# Altium PCB PCB2.PcbDoc
Units mm, origin at the board's own origin, x right, y up, seen from the top; angles counter-clockwise.
Board outline 62 x 43 mm, 4 copper layers (L1 (Signal), L2 (GND), L3 (GND), L4 (GND)), stack 1.57 mm thick; 46 components, 31 nets, 234 pads, 56 vias.
Unrouted connection lines stored in the file: 7.
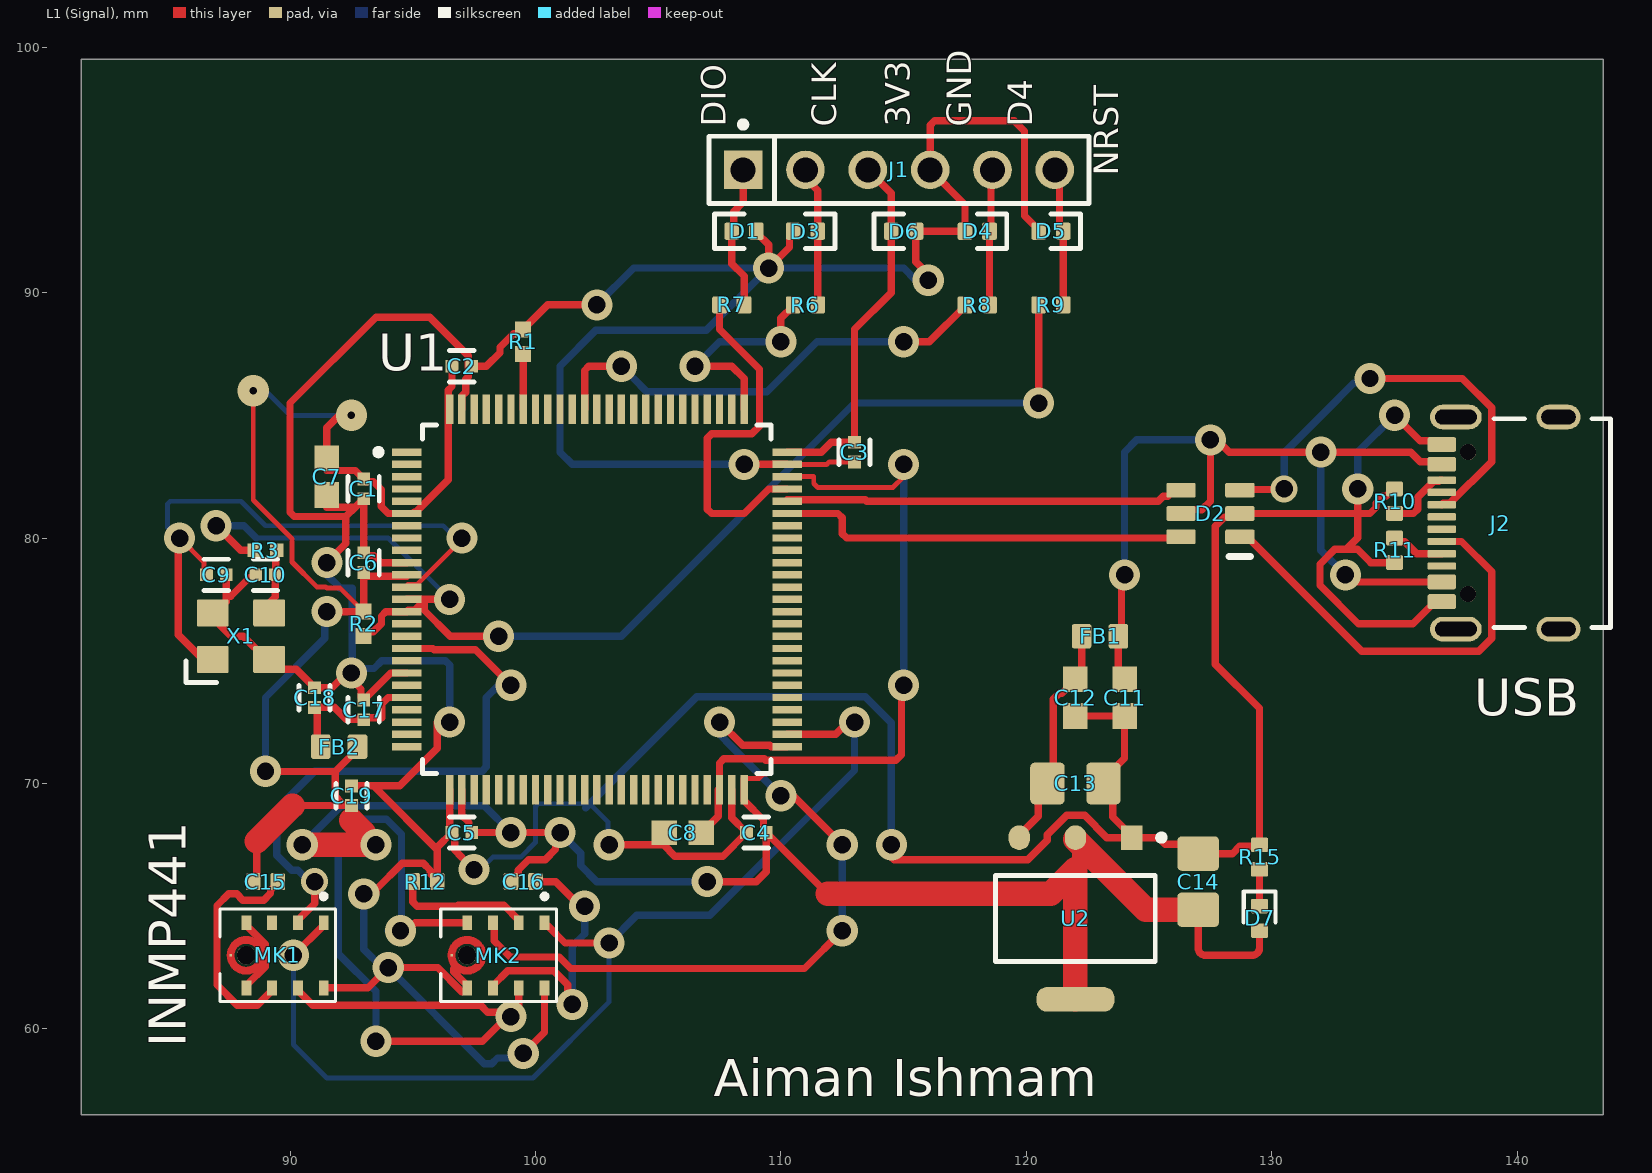
[diagram p0: L1 (Signal) view]
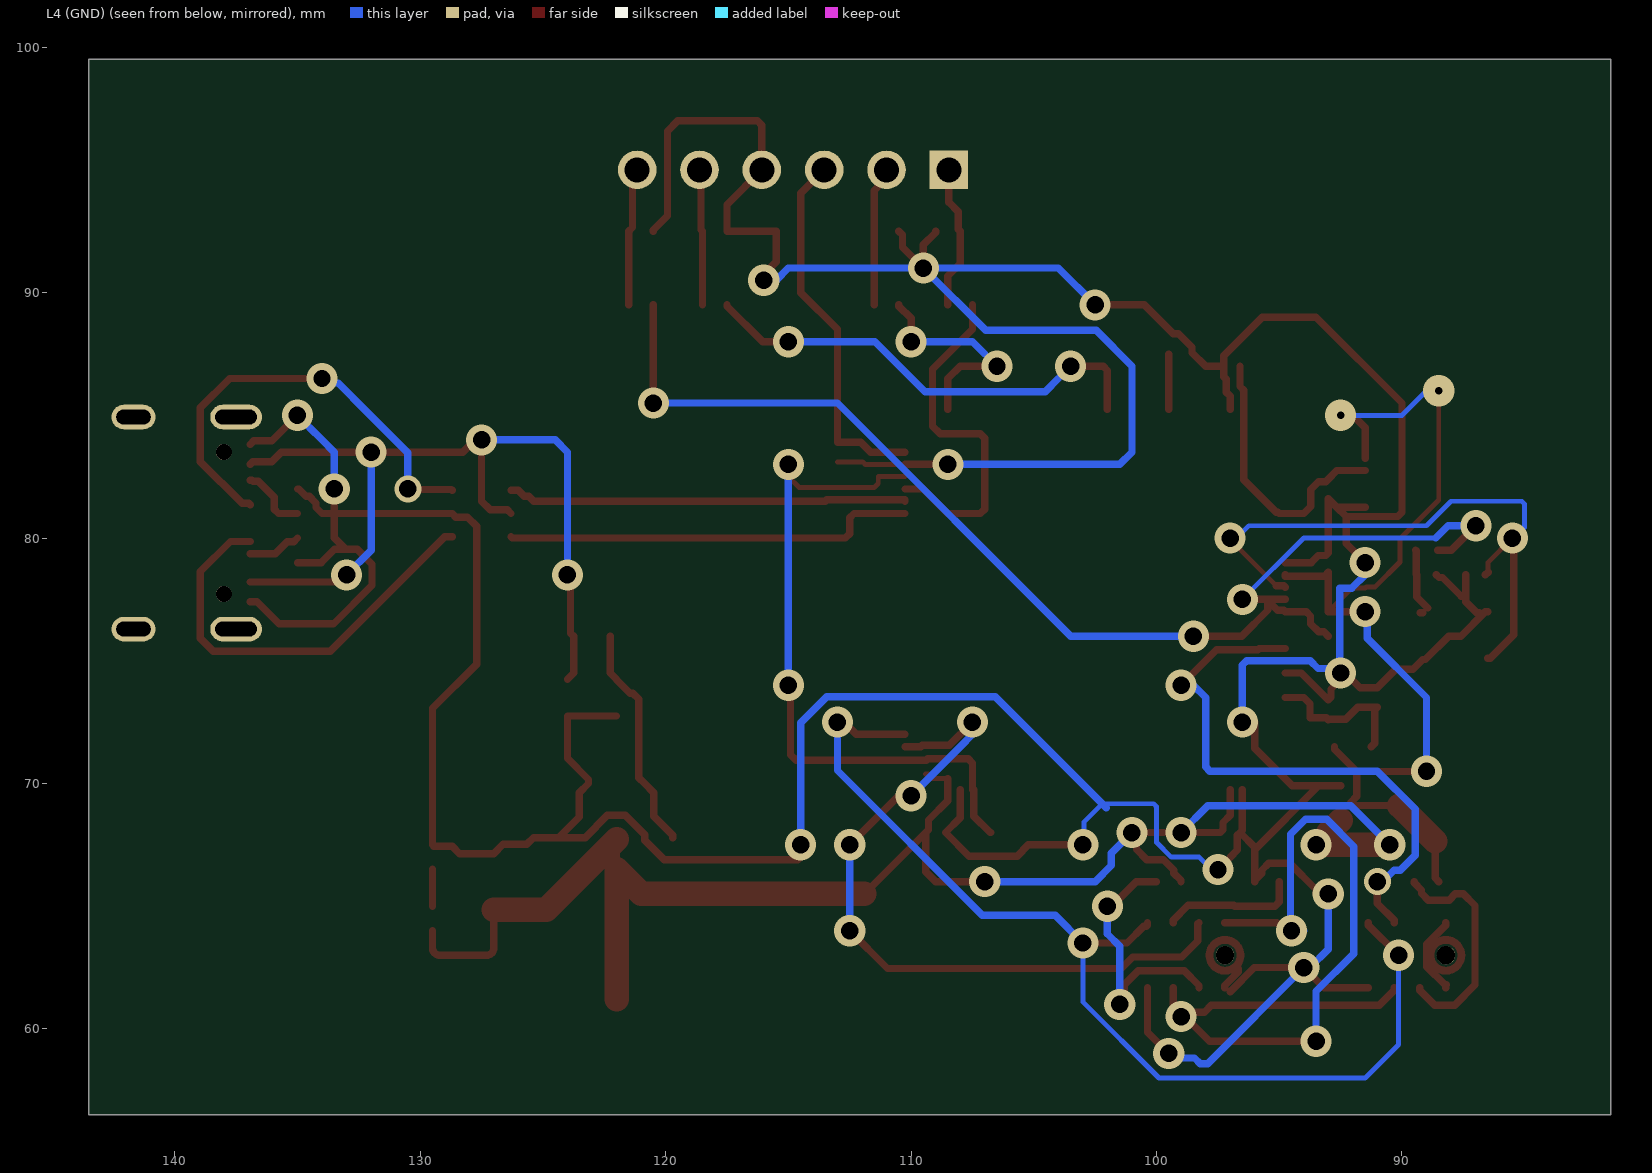
[diagram p1: L4 (GND) view, seen from below]
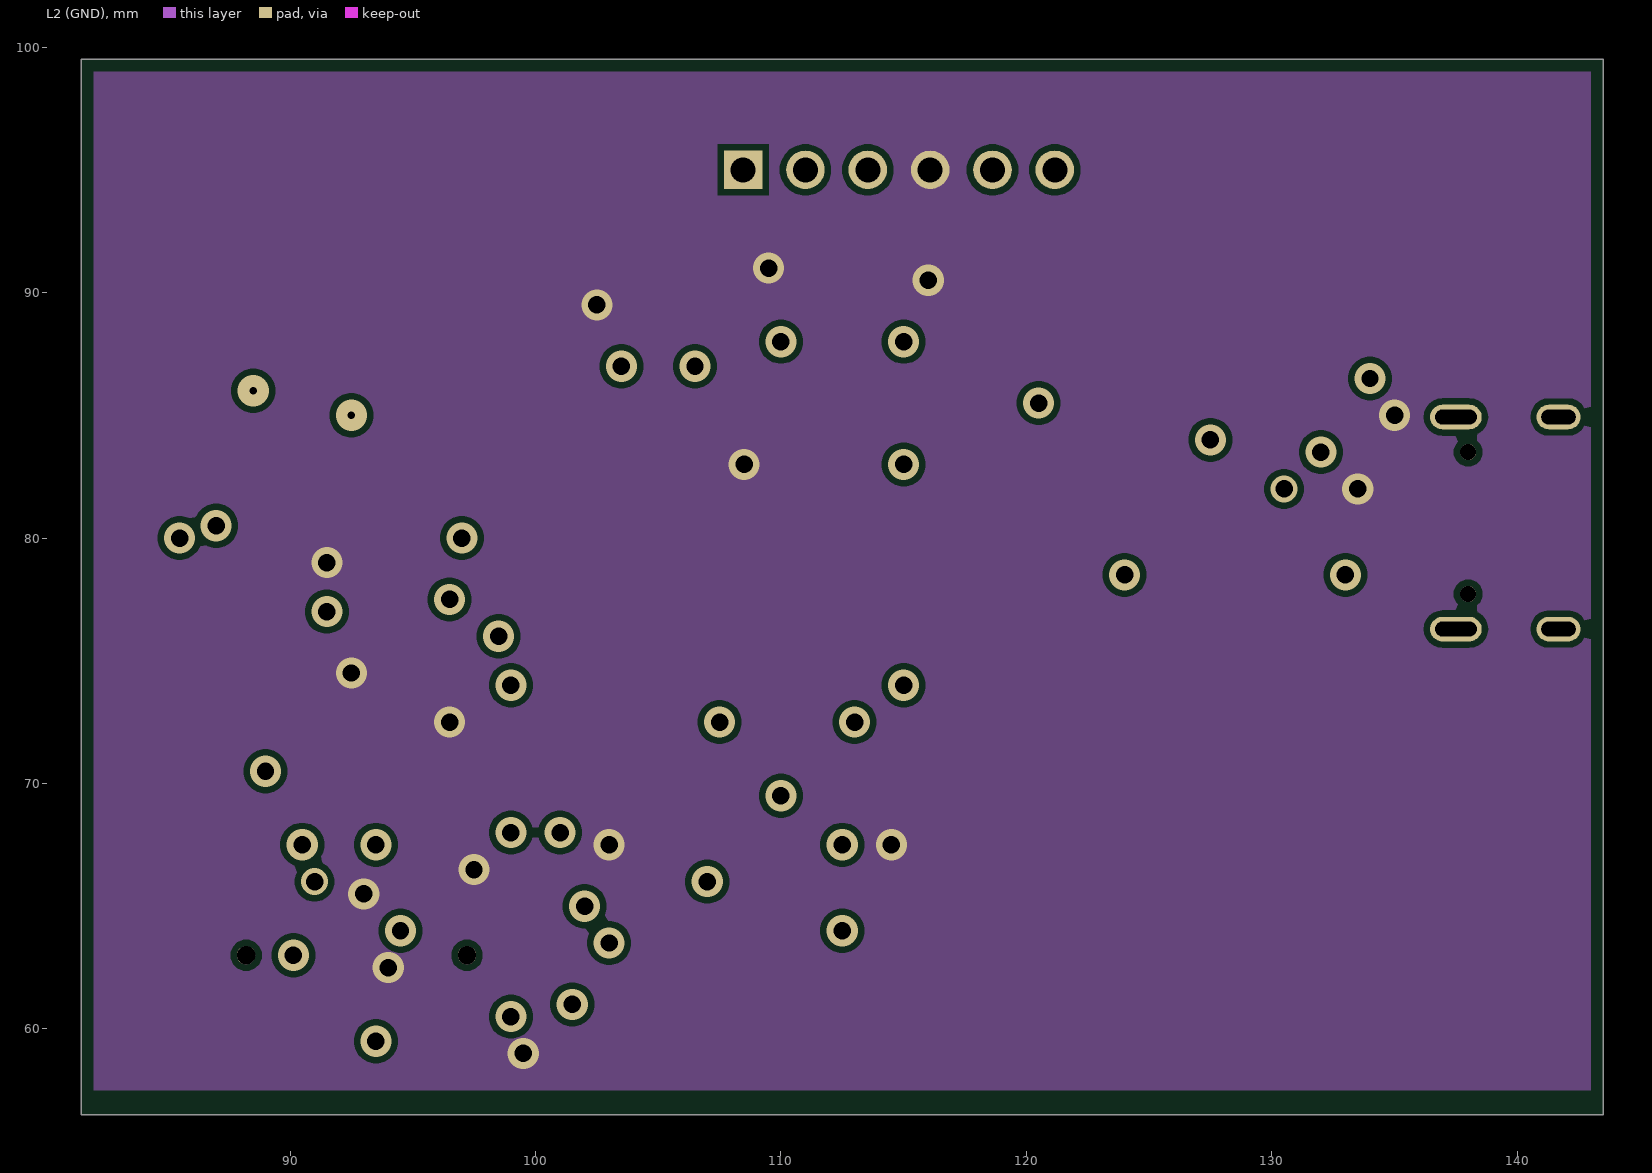
[diagram p2: L2 (GND)]
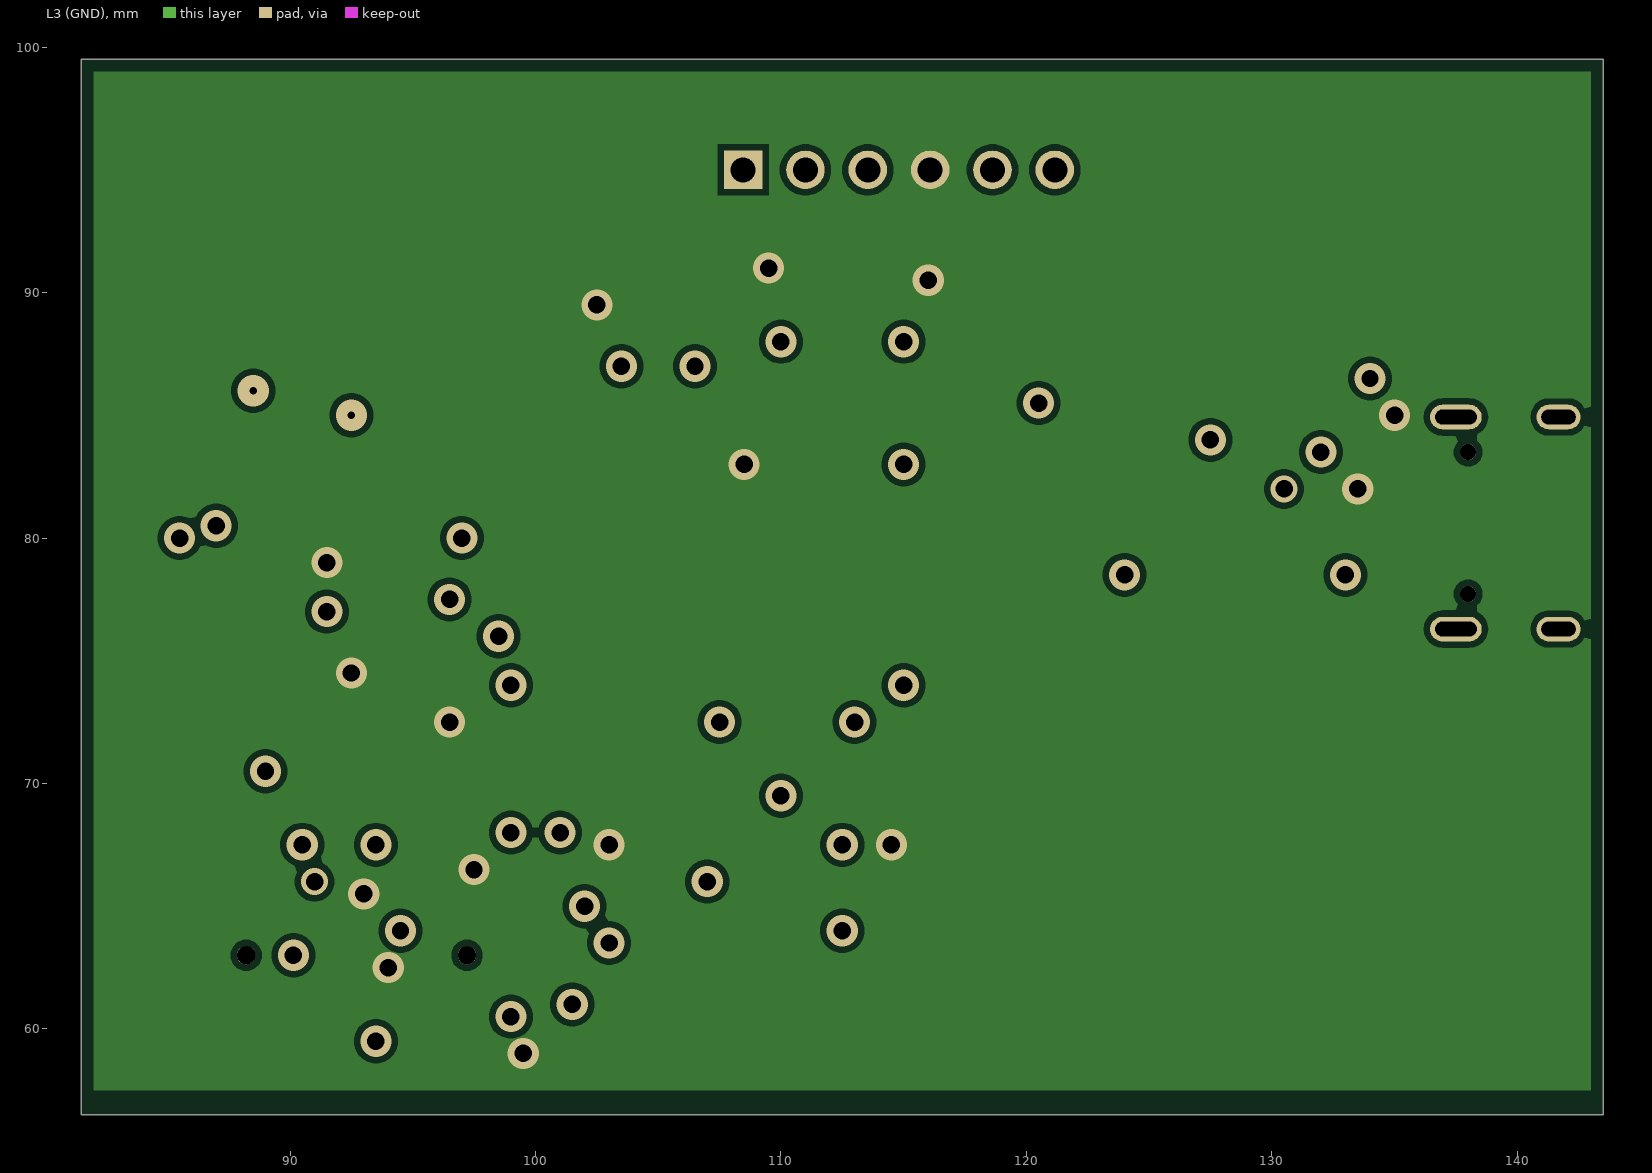
[diagram p3: L3 (GND)]
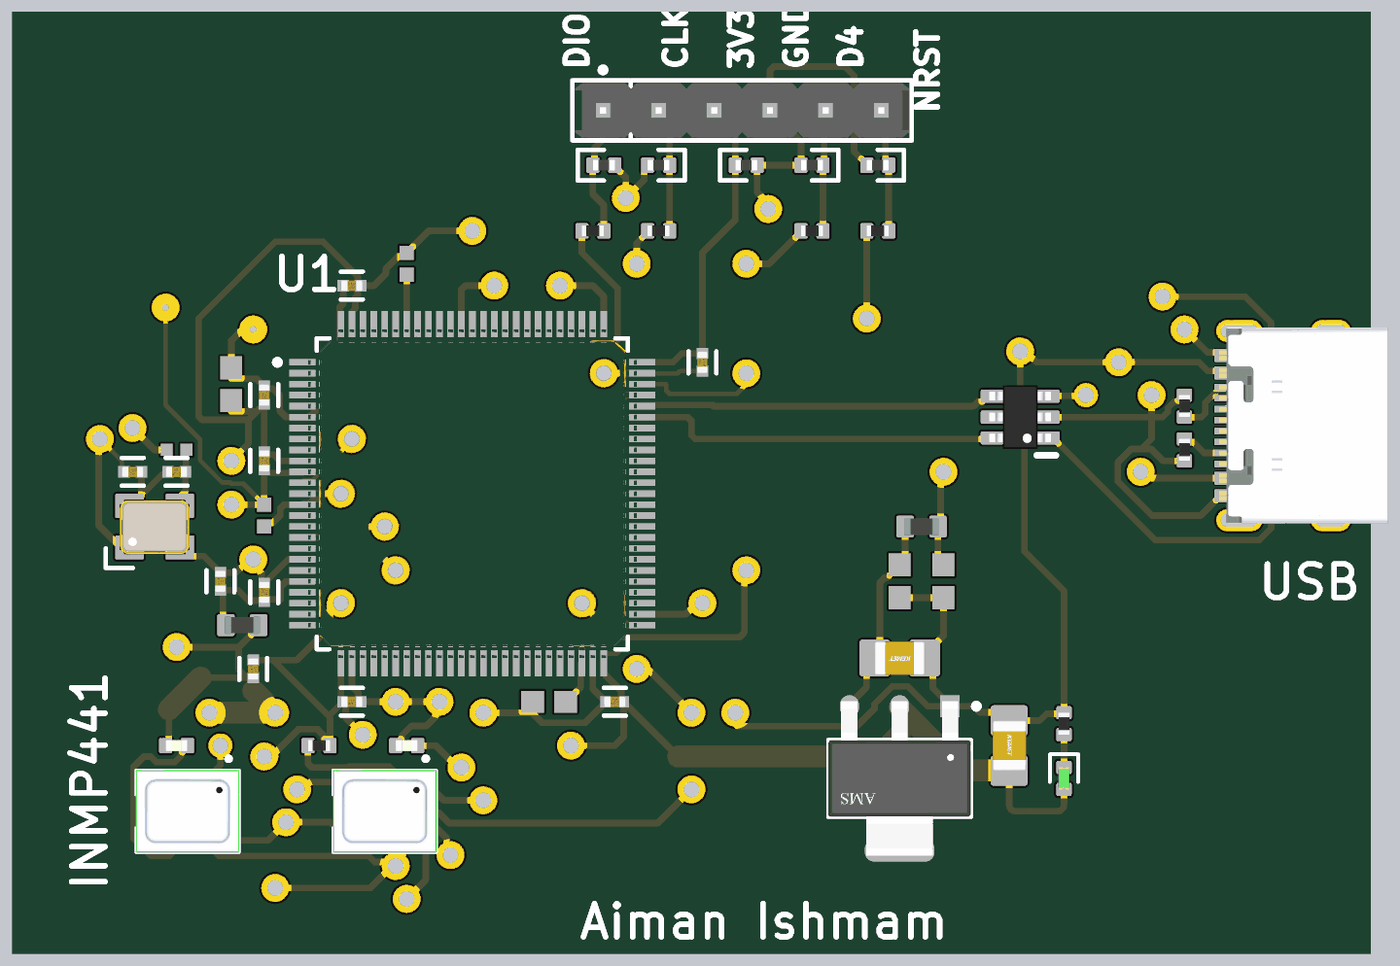
[diagram p4: 3D render of the assembled board from above, using the file's embedded part models]

## Layer stack, top to bottom
Top Solder: solder mask 0.0254, SM-001, Dk 4
L1 (Signal): signal copper 0.035
Dielectric 1: prepreg 0.2, PP-017, Dk 4.6
L2 (GND): signal copper 0.0175
Dielectric 3: core 1.065, Core-039, Dk 4.6
L3 (GND): signal copper 0.0175
Dielectric 5: prepreg 0.2, PP-017, Dk 4.6
L4 (GND): signal copper 0.035
Bottom Solder: solder mask 0.0254, SM-001, Dk 4

## Board outline
81.5,56.5 143.5,56.5 143.5,99.5 81.5,99.5

## Design rules (kind name [scope] priority, off if disabled: settings)
AssemblyTestPointUsage [All] p1: isadvanced=TRUE
AssemblyTestpoint [All] p1: isadvanced=TRUE testpointundercomponent=TRUE minsize=1.016 maxsize=2.54 preferedsize=1.524 minholesize=0 maxholesize=1.016 preferedholesize=0.813 testpointgrid=0.025 usegrid=TRUE gridtolerance=0 allowsidetop=TRUE allowsidebottom=TRUE
Clearance Clearance_1 [(ExistsOnLayer('L2 (GND)') Or ExistsOnLayer('L3 (GND)')) vs (ExistsOnLayer('L2 (GND)') Or ExistsOnLayer('L3 (GND)'))] p1: gap=0.254 ignorepadtopadclearanceinfootprint=FALSE sourcerule=38 cellrowname=All cellrowtype=0 cellcolname=All cellcoltype=0 innerlayers=TRUE
Clearance Clearance_2 [(ExistsOnLayer('L1 (Signal)') Or ExistsOnLayer('L4 (GND)')) vs (ExistsOnLayer('L1 (Signal)') Or ExistsOnLayer('L4 (GND)'))] p2: gap=0.254 ignorepadtopadclearanceinfootprint=FALSE sourcerule=38 cellrowname=All cellrowtype=0 cellcolname=All cellcoltype=0 outerlayers=TRUE
Clearance [All] p3: gap=0.254 ignorepadtopadclearanceinfootprint=FALSE ismatrix=TRUE
ComponentClearance [All] p1: isadvanced=TRUE gap=0.254 collisioncheckmode=3 verticalgap=0.254 showdistances=FALSE
DiffPairsRouting DifferentialPairsRouting_1 [All] p1: isadvanced=TRUE maxlimit=0.254 minlimit=0.254 mostfreqgap=0.254 toplayer_minwidth=0.381 toplayer_maxwidth=0.381 toplayer_prefwidth=0.381 midlayer1_minwidth=0.381 midlayer1_maxwidth=0.381 midlayer1_prefwidth=0.381 midlayer2_minwidth=0.381 midlayer2_maxwidth=0.381 midlayer2_prefwidth=0.381 bottomlayer_minwidth=0.381 bottomlayer_maxwidth=0.381 bottomlayer_prefwidth=0.381 maxuncoupledlength=0.254
DiffPairsRouting [All] p2: maxlimit=0.254 minlimit=0.254 mostfreqgap=0.254 toplayer_minwidth=0.381 toplayer_maxwidth=0.381 toplayer_prefwidth=0.381 midlayer1_minwidth=0.381 midlayer1_maxwidth=0.381 midlayer1_prefwidth=0.381 midlayer2_minwidth=0.381 midlayer2_maxwidth=0.381 midlayer2_prefwidth=0.381 bottomlayer_minwidth=0.381 bottomlayer_maxwidth=0.381 bottomlayer_prefwidth=0.381 maxuncoupledlength=12.7
FabricationTestPointUsage [All] p1: isadvanced=TRUE valid=0 allowmultiple=FALSE
FabricationTestpoint [All] p1: isadvanced=TRUE side=3 testpointundercomponent=TRUE minsize=1.016 maxsize=2.54 preferedsize=1.524 minholesize=0 maxholesize=1.016 preferedholesize=0.813 testpointgrid=0.025 allowsidetop=TRUE allowsidebottom=TRUE usegrid=TRUE gridtolerance=0
FanoutControl Fanout_BGA [IsBGA] p1: isadvanced=TRUE bgadir=Out bgaviamode=Centered fanoutstyle=Auto fanoutdirection=Alternating viagrid=0.025 // Fanout_BGA (Default Rule)
FanoutControl Fanout_LCC [IsLCC] p2: isadvanced=TRUE bgadir=Out bgaviamode=Centered fanoutstyle=Auto fanoutdirection=Alternating viagrid=0.025 // Fanout_LCC (Default Rule)
FanoutControl Fanout_SOIC [IsSOIC] p3: isadvanced=TRUE bgadir=Out bgaviamode=Centered fanoutstyle=Auto fanoutdirection=Alternating viagrid=0.025 // Fanout_SOIC (Default Rule)
FanoutControl Fanout_Small [(CompPinCount < 5)] p4: isadvanced=TRUE bgadir=Out bgaviamode=Centered fanoutstyle=Auto fanoutdirection=OutThenIn viagrid=0.025 // Fanout_Small (Default Rule)
FanoutControl Fanout_Default [All] p5: isadvanced=TRUE bgadir=Out bgaviamode=Centered fanoutstyle=Auto fanoutdirection=Alternating viagrid=0.025 // Fanout_Default (Default Rule)
Height [All] p1: isadvanced=TRUE minheight=0 maxheight=25.4 prefheight=12.7
HoleSize [All] p1: isadvanced=TRUE absolutevalues=TRUE maxlimit=2.54 minlimit=0.025 maxpercent=80.000 minpercent=20.000
HoleToHoleClearance [All] p1: isadvanced=TRUE gap=0.254 allowstackedmicrovias=TRUE
LayerPairs [All] p1: isadvanced=TRUE enforce=TRUE
MinimumSolderMaskSliver [All] p1: isadvanced=TRUE minsoldermaskwidth=0.254
NetAntennae [All] p1: isadvanced=TRUE netantennaetolerance=0
PasteMaskExpansion [All] p1: isadvanced=TRUE expansion=0
PlaneClearance [All] p1: isadvanced=TRUE clearance=0.508
PlaneConnect [All] p1: isadvanced=TRUE planeconnectstyle=Relief reliefexpansion=0.508 reliefentries=4 reliefconductorwidth=0.254 reliefairgap=0.254
PolygonConnect [All] p1: connectstyle=Direct reliefconductorwidth=0.254 reliefentries=4 polygonreliefangle="90 Angle" airgapwidth=0.254
RoutingCorners [All] p1: isadvanced=TRUE cornerstyle=45-Degree minsetback=2.54 maxsetback=2.54
RoutingPriority [All] p1: isadvanced=TRUE routingpriority=0
RoutingVias [All] p1: holewidth=0.711 width=1.27 viastyle="Through Hole" minholewidth=0.711 minwidth=1.27 maxholewidth=0.711 maxwidth=1.27
ShortCircuit [All] p1: isadvanced=TRUE allowed=FALSE
SilkToSilkClearance [All] p1: isadvanced=TRUE silktosilkclearance=0.254
SilkToSolderMaskClearance [IsPad] p1: isadvanced=TRUE minsilkscreentomaskgap=0.254 clearancetoexposedcopper=TRUE
SolderMaskExpansion [All] p1: isadvanced=TRUE expansion=0.102 istentingtop=FALSE
UnRoutedNet [All] p1: isadvanced=TRUE checkbadconnections=TRUE
UnpouredPolygon [All] p1: isadvanced=TRUE
Width MaxMinWidth_1 [All] p1: isadvanced=TRUE maxlimit=1 minlimit=0.2 preferedwidth=0.3 midlayer1_minwidth=0.254 midlayer1_maxwidth=0.254 midlayer1_prefwidth=0.254 midlayer2_minwidth=0.254 midlayer2_maxwidth=0.254 midlayer2_prefwidth=0.254 minimp=50.000000 maximp=50.000000 favimp=50.000000
Width [All] p2: maxlimit=0.254 minlimit=0.254 preferedwidth=0.254
3 further rules are at their usual default settings.

## Classes and differential pairs
component class USB_Connector: C11 C12 C13 C14 D2 D7 FB1 J2 R10 R11 R15 U2
component class INMP441: C15 C16 MK1 MK2 R12

## Components (designator, comment, footprint, x,y, rotation, side; value= is the part's Value field where it differs from the comment)
C1 "100n" FP-C0402-BB-MFG 93,82 r270 top value="0.10 μF"
C2 "100n" FP-C0402-BB-MFG 97,87 r0 top value="0.10 μF"
C3 "100n" FP-C0402-BB-MFG 113,83.5 r270 top value="0.10 μF"
C4 "100n" FP-C0402-BB-MFG 109,68 r180 top value="0.10 μF"
C5 "100n" FP-C0402-BB-MFG 97,68 r180 top value="0.10 μF"
C6 "100n" FP-C0402-BB-MFG 93,79 r90 top value="0.10 μF"
C7 "2.2u" CAPC1608X90X35NL15T15 91.5,82.5 r90 top
C8 "2.2u" CAPC1608X90X35NL15T15 106,68 r180 top
C9 "10pF" FP-C0402-BB-MFG 87,78.5 r0 top value="10 pF"
C10 "10pF" FP-C0402-BB-MFG 89,78.5 r180 top value="10 pF"
C11 "2.2u" CAPC1608X90X35NL15T15 124,73.5 r90 top
C12 "2.2u" CAPC1608X90X35NL15T15 122,73.5 r90 top
C13 "22u" CAP_0805 122,70 r180 top
C14 "22u" CAP_0805 127,66 r270 top
C15 "0.1u" CAP_0402 89,66 r180 top
C16 "0.1u" CAP_0402 99.5,66 r180 top
C17 "100n" FP-C0402-BB-MFG 93,73 r90 top value="0.10 μF"
C18 "100n" FP-C0402-BB-MFG 91,73.5 r90 top value="0.10 μF"
C19 "100n" FP-C0402-BB-MFG 92.5,69.5 r90 top value="0.10 μF"
D1 "" D_0402 108.5,92.5 r180 top
D2 "USBLC6-2SC6" SOT-23-6 127.5,81 r90 top
D3 "" D_0402 111,92.5 r0 top
D4 "" D_0402 118,92.5 r0 top
D5 "" D_0402 121,92.5 r0 top
D6 "" D_0402 115,92.5 r180 top
D7 "GREEN" LED_0402_GREEN 129.5,64.5 r90 top
FB1 "120R" FB_0603 123,76 r180 top
FB2 "200R" FB_0603 92,71.5 r180 top
J1 "22-28-4060" FP-22-28-4060-MFG 114.81,95 r0 top
J2 "USB4105-GF-A-060" USB4105-GF-A-060 139.303,80.61 r90 top
MK1 "INMP441ACEZ-R7" MIC_INMP441ACEZ-R7 89.5,63 r0 top
MK2 "INMP441ACEZ-R7" MIC_INMP441ACEZ-R7 98.5,63 r0 top
R1 "10K" RESC1005X40X25ML05T05 99.5,88 r270 top
R2 "10K" RESC1005X40X25ML05T05 93,76.5 r270 top
R3 "1K" RESC1005X40X25NL05T05 89,79.5 r0 top
R6 "22R" RES_0402 111,89.5 r0 top
R7 "22R" RES_0402 108,89.5 r0 top
R8 "22R" RES_0402 118,89.5 r0 top
R9 "22R" RES_0402 121,89.5 r0 top
R10 "5K1" RES_0402 135,81.5 r270 top
R11 "5K1" RES_0402 135,79.5 r90 top
R12 "100k" RES_0402 95.5,66 r180 top
R15 "1k" RES_0402 129.5,67 r270 top
U1 "STM32H750VBT6" FP-LQFP100-1L-MFG 102.5,77.5 r0 top
U2 "AMS1117-3.3" FP-AMS1117-IPC_C 122,64.5 r270 top
X1 "24MHz" XTAL_3225 88,76 r0 top

## Footprints (in the part's own frame and the unit in brackets; to place one, negate y for a bottom-side part, rotate by r counter-clockwise, add the part's x,y. Pads: shape width x height; smd on the part's side, far side on the other; paste and mask are expansions set on the pad)
CAP_0402 [mm]
  rrect25% 0.6x0.7 smd: 1(-0.5,0) 2(0.5,0)
  body extent -0.5,-0.26 0.5,0.26, height 0.37
CAP_0805 [mm]
  rrect25% 1.4x1.7 smd: 1(-1.143,0) 2(1.143,0)
  body extent -1.15,-0.76 1.15,0.79, height 1.01
CAPC1608X90X35NL15T15 [mm] "Chip Capacitor, 2-Leads, Body 1.60x0.81mm, IPC Medium Density"
  rect 1.05x1 smd: 1(-0.75,0) 2(0.75,0)
  body extent -0.88,-0.48 0.87,0.48, height 0.9
D_0402 [mm]
  rrect25% 0.6x0.7 smd: A(-0.5,0) K(0.5,0)
  silkscreen extent 0,-0.7 1.2,0.7, body extent -0.5,-0.25 0.5,0.25, height 0.51
FB_0603 [mm]
  rrect25% 0.8x1 smd: 1(-0.75,0) 2(0.75,0)
  body extent -0.8,-0.4 0.8,0.4, height 0.81
FP-22-28-4060-MFG [mm]
  rect 1.57x1.57 hole 1.02 paste-2539.97 mask+0: 1(-6.35,0)
  round 1.57 hole 1.02 paste-2539.97 mask+0: 2(-3.81,0) 3(-1.27,0) 4(1.27,0) 5(3.81,0) 6(6.35,0)
  silkscreen extent -7.75,-1.37 7.75,1.97, body extent -7.62,-1.25 7.62,1.24, height 8.88
FP-AMS1117-IPC_C [mm]
  rect 1.004x0.872 smd paste+0 mask+0: 1(-3.295,2.29)
  rrect100% 1.004x0.872 smd paste+0 mask+0: 2(-3.295,0) 3(-3.295,-2.29)
  rrect87% 1.004x3.182 smd paste+0 mask+0: 4(3.295,0)
  silkscreen extent -3.42,-3.25 1.75,3.63, body extent -3.9,-3.35 3.9,3.35, height 0.25
FP-C0402-BB-MFG [mm]
  rect 0.52x0.52 smd paste+0 mask+0: 1(-0.4,0) 2(0.4,0)
  silkscreen extent -0.5,-0.64 0.5,0.64, body extent -0.8,-0.4 0.8,0.4, height 0.25
FP-LQFP100-1L-MFG [mm]
  rect 1.2x0.3 smd paste+0 mask+0: 1(-7.75,6) 2(-7.75,5.5) 3(-7.75,5) 4(-7.75,4.5) 5(-7.75,4) 6(-7.75,3.5) 7(-7.75,3) 8(-7.75,2.5) 9(-7.75,2) 10(-7.75,1.5) 11(-7.75,1) 12(-7.75,0.5) 13(-7.75,0) 14(-7.75,-0.5) 15(-7.75,-1) 16(-7.75,-1.5) 17(-7.75,-2) 18(-7.75,-2.5) 19(-7.75,-3) 20(-7.75,-3.5) 21(-7.75,-4) 22(-7.75,-4.5) 23(-7.75,-5) 24(-7.75,-5.5) 25(-7.75,-6) 51(7.75,-6) 52(7.75,-5.5) 53(7.75,-5) 54(7.75,-4.5) 55(7.75,-4) 56(7.75,-3.5) 57(7.75,-3) 58(7.75,-2.5) 59(7.75,-2) 60(7.75,-1.5) 61(7.75,-1) 62(7.75,-0.5) 63(7.75,0) 64(7.75,0.5) 65(7.75,1) 66(7.75,1.5) 67(7.75,2) 68(7.75,2.5) 69(7.75,3) 70(7.75,3.5) 71(7.75,4) 72(7.75,4.5) 73(7.75,5) 74(7.75,5.5) 75(7.75,6)
  rect 0.3x1.2 smd paste+0 mask+0: 26(-6,-7.75) 27(-5.5,-7.75) 28(-5,-7.75) 29(-4.5,-7.75) 30(-4,-7.75) 31(-3.5,-7.75) 32(-3,-7.75) 33(-2.5,-7.75) 34(-2,-7.75) 35(-1.5,-7.75) 36(-1,-7.75) 37(-0.5,-7.75) 38(0,-7.75) 39(0.5,-7.75) 40(1,-7.75) 41(1.5,-7.75) 42(2,-7.75) 43(2.5,-7.75) 44(3,-7.75) 45(3.5,-7.75) 46(4,-7.75) 47(4.5,-7.75) 48(5,-7.75) 49(5.5,-7.75) 50(6,-7.75) 76(6,7.75) 77(5.5,7.75) 78(5,7.75) 79(4.5,7.75) 80(4,7.75) 81(3.5,7.75) 82(3,7.75) 83(2.5,7.75) 84(2,7.75) 85(1.5,7.75) 86(1,7.75) 87(0.5,7.75) 88(0,7.75) 89(-0.5,7.75) 90(-1,7.75) 91(-1.5,7.75) 92(-2,7.75) 93(-2.5,7.75) 94(-3,7.75) 95(-3.5,7.75) 96(-4,7.75) 97(-4.5,7.75) 98(-5,7.75) 99(-5.5,7.75) 100(-6,7.75)
  silkscreen extent -9.02,-7.1 7.1,7.1, body extent -8.45,-8.45 8.45,8.45, height 0.25
LED_0402_GREEN [mm]
  rrect25% 0.6x0.7 smd: A(-0.5,0) K(0.5,0)
  silkscreen extent -0.15,-0.65 1.1,0.65, body extent -0.51,-0.25 0.51,0.25, height 0.45
MIC_INMP441ACEZ-R7 [mm]
  rect 0.4x0.6 smd paste-0.025: 1(1.87,1.33) 2(0.82,1.33) 3(-0.23,1.33) 4(-1.28,1.33) 6(-1.28,-1.33) 7(-0.23,-1.33) 8(0.82,-1.33) 9(1.87,-1.33)
  rect 0.1x0.1 smd paste-1 mask+0: 5(-1.92,0)
  round 0.75 hole 0.75 unplated mask+0.505: ""(-1.29,0)
  L1 (Signal) region: 244 vertices and 0 holes, not listed, extent -2.07,-0.78 -0.51,0.78
  silkscreen extent -2.36,-1.88 2.36,2.5, body extent -2.36,-1.88 2.36,1.88, height 1.05
RES_0402 [mm]
  rrect25% 0.6x0.7 smd: 1(-0.5,0) 2(0.5,0)
  body extent -0.5,-0.25 0.5,0.25, height 0.3
RESC1005X40X25ML05T05 [mm] "Chip Resistor, 2-Leads, Body 1.00x0.50mm, IPC Low Density"
  rect 0.65x0.65 smd: 1(-0.5,0) 2(0.5,0)
  body extent -0.53,-0.27 0.53,0.28, height 0.4
RESC1005X40X25NL05T05 [mm] "Chip Resistor, 2-Leads, Body 1.00x0.50mm, IPC Medium Density"
  rect 0.55x0.55 smd: 1(-0.45,0) 2(0.45,0)
  body extent -0.53,-0.27 0.53,0.28, height 0.4
SOT-23-6 [mm]
  rrect25% 0.6x1.2 smd: 1(-0.95,-1.2) 2(0,-1.2) 3(0.95,-1.2) 4(0.95,1.2) 5(0,1.2) 6(-0.95,1.2)
  silkscreen extent -1.75,-1.63 -1.75,-0.76, body extent -1.45,-1.4 1.45,1.4, height 1.45
USB4105-GF-A-060 [mm]
  rrect25% 0.6x1.15 smd mask+0.05: A1B12(-3.2,2.378) A4B9(-2.4,2.378) B1A12(3.2,2.378) B4A9(2.4,2.378)
  rrect25% 0.3x1.15 smd mask+0.05: A5(-1.25,2.378) A6(-0.25,2.378) A7(0.25,2.378) A8(1.25,2.378) B5(1.75,2.378) B6(0.75,2.378) B7(-0.75,2.378) B8(-1.75,2.378)
  round 0.65 hole 0.65 unplated mask+0.05: MH(-2.89,1.303) MH(2.89,1.303)
  oval 1x1.8 hole 0.6 slot 1.4 at 90 deg: SH(-4.32,-2.377) SH(4.32,-2.377)
  oval 1x2.1 hole 0.6 slot 1.7 at 90 deg: SH(-4.32,1.803) SH(4.32,1.803)
  silkscreen extent -4.25,-4.5 4.25,0.25, body extent -4.47,-4.97 4.47,2.73, height 3.27
XTAL_3225 [mm]
  rrect10% 1.3x1.1 smd: 1(-1.15,-0.95) 2(1.15,-0.95) 3(1.15,0.95) 4(-1.15,0.95)
  silkscreen extent -2.23,-1.89 -1,-1, body extent -1.6,-1.28 1.6,1.22, height 0.61

## Part data
C1 C2 C3 C4 C5 C6 C17 C18 C19: library part CMP-03020-006638-2, "C0402 0.10 μF X7R 5.00% 16 V", Capacitance="0.10 μF", Manufacturer=Kemet, Manufacturer Part Number=C0402C104J4RAC, Package=C0402-BB, Temperature="-55°C to +125°C", Temperature Characteristic=X7R, Temperature Coefficient=15%, Temperature Range High=+125°C, Temperature Range Low=-55°C, Tolerance=0.05, Voltage Rating="16 V", Automotive=No, Category=Cap, ComponentLink2Description=Datasheet, ComponentLink2URL=https://content.kemet.com/datasheets/KEM_C1002_X7R_SMD.pdf, Device Class L1="Passive Components", Device Class L2=Capacitors, Device Class L3="Ceramic Capacitors", Height=0.55mm, Ipc Land Pattern Name=CAPC10050X50, Lead Free=Yes, Material=Ceramic, Mouser Description="Capacitor, Ceramic, 100nF, 16VDC, 5-% Tol, 5+% Tol, X7R-TC Code, -15, 15%-TC", Octopart=https://octopart.com/c0402c104j4rac-kemet-24931384, RoHS=TRUE
C7 C8 C11 C12: library part CMP-1035-02765-2, Manufacturer=Kemet, Part Number=C0603C225M4PACTU
C9 C10: library part CMP-2008-03377-2, "CAP CER 10PF 16V NP0 0402", Capacitance="10 pF", Manufacturer=Kemet, Manufacturer Part Number=C0402C100J4GACTU, Package=C0402-BB, Temperature="-55°C to +125°C", Temperature Characteristic=C0G, Temperature Coefficient=15%, Temperature Range High=+125°C, Temperature Range Low=-55°C, Tolerance=0.05, Voltage Rating="16 V", Automotive=No, Category=Cap, ComponentLink2Description=Datasheet, ComponentLink2URL=https://content.kemet.com/datasheets/KEM_C1002_X7R_SMD.pdf, Device Class L1="Passive Components", Device Class L2=Capacitors, Device Class L3="Ceramic Capacitors", Digikey Description="CAP CER 10PF 16V NP0 0402", Height=0.55mm, Ipc Land Pattern Name=CAPC10050X50, Lead Free=Yes, Material=Ceramic, Mouser Description="Capacitor, Ceramic, 10Pf, 16Vdc, 5-% Tol, 5+% Tol, C0g-Tc Code, -30, 30Ppm-Tc Rohs Compliant: Yes", Octopart=https://octopart.com/c0402c100j4gactu-kemet-17536146, RoHS=TRUE
C13 C14: library part CAP_0805, "Capacitor SMD 0805"
C15 C16: library part CAP_0402, "Capacitor SMD 0402"
D1 D3 D4 D5 D6: library part D_TVS_0402, "Diode TVS / ESD 0402"
D2: "Low-Capacitance ESD Protection USB", Manufacturer=STMicroelectronics, Distributor Link=https://www.mouser.de/ProductDetail/STMicroelectronics/USBLC6-2SC6?qs=po45yt2pPpu%2FhNIlwQdTlg%3D%3D, Manufacturer Part Number=USBLC6-2SC6
D7: library part LED_0402_GREEN, "LED 0402 GREEN SMD"
FB1 FB2: library part FB_0603, "Ferrite Bead SMD 0603"
J1: library part CMP-04776-000763-1, "CONN HEADER VERT 6POS 2.54MM", Color=Black, Contact Resistance=20mR, Current Rating=4A, Max Operating Temperature=75°C, Max Voltage Rating (AC)=250V, Max Voltage Rating (DC)=250.25kV, Min Operating Temperature=0°C, Package Quantity=1, Connector Type="Male Pin", Contact Material=Brass, Contact Mating Length=0.24inch, Contact Plating=Tin, Contact Type="Male Pin", Depth=2.49mm, Gender=Male, Housing Color=Black, Housing Material=Thermoplastic, Length=15.24mm, Mount="Through Hole", Number Of Contacts=6, Number of Positions=6, Number Of Rows=1, Orientation=Straight, Packaging=Bulk, Pitch=2.54mm, RoHS Compliant=Yes, Series="KK® 42375", Termination=Solder, Voltage Rating=250V
J2: "USB Connector Type C SMT 12 Pin", Manufacturer=GCT, Distributor Link=https://eu.mouser.com/ProductDetail/GCT/USB4105-GF-A-060?qs=QNEnbhJQKvY2mocwNJzgfA%3D%3D, Manufacturer Part Number=USB4105-GF-A-060
MK1 MK2: "60 Hz ~ 15 kHz Digital, I2S Microphone MEMS (Silicon) 1.62 V ~ 3.63 V Omnidirectional (-26dB Â±3dB @ 94dB SPL) Solder Pads", Package="LGA-9 TDK InvenSense", Check_prices=https://www.snapeda.com/parts/INMP441ACEZ-R7/TDK/view-part/?ref=eda, MF="TDK InvenSense", MP=INMP441ACEZ-R7, SnapEDA_Link=https://www.snapeda.com/parts/INMP441ACEZ-R7/TDK/view-part/?ref=snap
R1 R2: library part CMP-2002-00433-1, Manufacturer=Panasonic, Part Number=ERJ-2GEJ103X
R3: library part CMP-2002-00432-1, Manufacturer=Panasonic, Part Number=ERJ-2GEJ102X
R6 R7 R8 R9 R10 R11 R12 R15: library part RES_0402, "Resistor SMD 0402"
U1: library part CMP-12105-000017-1, "IC MCU 32BIT 128KB FLASH 100LQFP", Ambient Temperature Range High=+85°C, Ambient Temperature Range Low=-40°C, Frequency=480MHz, Manufacturer=STMicroelectronics, Max Junction Temp=+125°C, Max Supply Voltage=3.6V, Min Supply Voltage=1.62V, Package=LQFP100-1L, Temperature="-40°C to +125°C", Automotive=No, Category=IC, ComponentLink2Description=Datasheet, ComponentLink2URL=https://www.st.com/resource/en/datasheet/stm32h750vb.pdf, Core Architecture="ARM Cortex-M7", Data Bus Width=32bits, Device Class L1="Integrated Circuits (ICs)", Device Class L2="Embedded Processors and Controllers", Device Class L3=Microcontrollers, Digikey Description="IC MCU 32BIT 128KB FLASH 100LQFP", Height=1.6mm, Interface=I2C,SPI,UART,USART,CAN,USB,LIN,IrDA,Ethernet,I2S,Other, Lead Free=Yes, Manufacturer Part Number=STM32H750VBT6, Memory Size=128KBytes, Memory Type=FLASH, Mouser Description="MCU 32-Bit STM32H750VB ARM Cortex M7 RISC 128KB Flash 1.8V/2.5V/3.3V 100-Pin LQFP Tray", Number Of A/D Converters=3, Number Of Adc Channels=36, Number Of Cores=1, Number Of Ethernet Channels=1, Number Of I2C Channels=4, Number Of I/Os=82, Number Of Pwm Channels=42, Number Of Spi Channels=6, Number Of Timers/Counters=20, Number Of Uart Channels=9, Number Of Usb Channels=2, Octopart=https://octopart.com/stm32h750vbt6-stmicroelectronics-94048547, Ram Size=1MBytes, RoHS=TRUE, Standoff Height=0.05mm, Temperature Range High=+125°C, Temperature Range Low=-40°C
U2: library part CMP-209535-000001-1, "LDO Voltage Regulators 1A, 3.3V", Dropout Voltage=1.1V, Manufacturer="Advanced Monolithic Systems", Max Junction Temp=+125°C, Max Power Dissipation=1.2W, Max Supply Voltage=15V, Nominal Supply Current=5mA, Output Current=1A, Output Voltage=3.3V, Package=AMS1117, Temperature="-40°C to +125°C", Temperature Range Low=-40°C, Automotive=No, Category=IC, ComponentLink2Description=Datasheet, ComponentLink2URL=http://www.advanced-monolithic.com/pdf/ds1117.pdf, Device Class L1="Integrated Circuits (ICs)", Device Class L2="Power Management ICs", Device Class L3="Voltage Regulators - Linear", Height=1.8mm, Ipc Land Pattern Name=SOT229P700X180-4, Lead Free=Yes, Manufacturer Part Number=AMS1117-3.3, Number Of Outputs=1, Octopart=https://octopart.com/ams1117-3.3-advanced+monolithic+systems-25899300, Output Type=Fixed, RoHS=TRUE, Standoff Height=0.64mm, Temperature Range High=+125°C
X1: library part TSX-3225_24.0000MF15X-AC, "Crystal SMD 24MHz 10PPM 7pF 3225", Manufacturer=Epson, Manufacturer Part Number="TSX-3225 24.0000MF15X-AC"

## Via types
v1: diameter 1.27, hole 0.711, L1 (Signal) to L4 (GND), 52 vias
v2: diameter 1.27, hole 0.3, L1 (Signal) to L4 (GND), 2 vias
v3: diameter 1.1, hole 0.711, L1 (Signal) to L4 (GND), 2 vias

## Nets (pads, with @x,y where several pads share a name; then routed paths per layer and width w, separated by ;. In a path a pad name is that pad's centre, name@x,y a point inside that pad or via, vN(x,y) a via of type N, cw(c..) or ccw(c..) an arc to the next point about the centre after c; other vN are vias at no path point)
+3V3: C1.1 C2.1 C3.1 C4.1 C5.1 C6.1 C7.2 C14.2 C15.2 C16.2 C19.1 D6.K D7.A FB2.1 J1.3 R2.1 U1.6 U1.11 U1.27 U1.50 U1.75 U1.100 U2.2 U2.4 | length 137.1
  L1 (Signal) w0.2: v2(88.5,86) 88.5,81.551 90.079,79.972 90.079,79.022 91.09,78.011 91.45,78.011 91.5,77.961 92.039,77.961 R2.1 ; U1.50@108.5,70.2 109.1,70.2 109.292,70.392 109.423,70.392
  L1 (Signal) w0.3: C15.2 88.65,66.15 88.65,67.65 ; v1@89.5,70.5 89.514,70.486 91.836,70.486 ; 90.1,69.1 C19.1 92.5,68.5 ; v1(91.5,77) R2.1 C6.1 93.154,78.446 94.75,78.446 U1.11 ; C7.2@91.5,82.75 92.65,82.75 C1.1 93.11,82.29 93.401,82.29 93.714,81.978 93.714,81.286 94,81 U1.6 95,81 95.054,81.054 95.125,81.054 96.446,82.375 96.446,86.017 96.6,86.171 C2.1 ; C7.2 91.5,84.5 v2@92,85 ; 92.099,69.21 91.836,69.473 91.836,70.486 ; FB2.1 92.75,71.4 91.836,70.486 ; U1.27 97,68.7 97.29,68.41 97.29,68.11 C5.1 v1(99,68) v1(101,68) 100.814,67.814 100.814,67.314 100.394,66.894 99.716,66.894 99.296,66.473 99.296,66.346 99,66.05 C16.2 ; v1@107.5,66 109,66 109.4,66.4 C4.1 ; U1.50@108.5,70.2 U1.50 108.5,69.3 109.29,68.51 109.29,68.11 C4.1 ; U1.75 111.65,83.5 112.05,83.9 C3.1 113,88.5 114.5,90 D6.K 114.5,94.04 J1.3 ; 111.9,65.5 C4.1 ; 122,66.5 U2.2 U2.2@122,67.729 ; C14.2 127,63.3 ccw(c127.3,63.3) 127.3,63 129.2,63 ccw(c129.2,63.3) 129.5,63.3 D7.A
  L1 (Signal) w1: 88.65,67.65 90.1,69.1 ; v1(90.5,67.5) v1(93.5,67.5) ; 92.5,68.5 93,68 ; 111.9,65.5 121,65.5 122,66.5 U2.4 ; U2.2@122,67.729 124.872,64.857 C14.2
  L4 (GND) w0.2: v2@88.5,86.5 90,85 v2(92.5,85)
  L4 (GND) w0.3: v1(89,70.5) 89,73.5 91.415,75.915 91.415,76.915 v1(91.5,77) ; v1(90.5,67.5) 92.093,69.093 97.907,69.093 v1(99,68) ; v1(101,68) 101.843,67.157 101.843,66.657 102.5,66 v1(107,66)
+5V: C12.2 C13.2 FB1.2 U2.3 | length 9.3
  L1 (Signal) w0.3: U2.3 119.71,67.889 120.482,68.661 120.482,69.625 C13.2 121.096,70.239 121.096,73.442 121.333,73.679 121.454,73.679 122,74.225 C12.2 122.25,74.5 FB1.2
ESD_IN_N: D2.1 J2.A7 J2.B7 | length 17.7
  L1 (Signal) w0.3: D2.1 129,80.05 133.664,75.386 138.424,75.386 138.954,75.916 138.954,78.634 137.728,79.86 J2.B7
ESD_IN_P: D2.3 J2.A6 J2.B6 | length 17.5
  L1 (Signal) w0.3: D2.3 128.725,81.975 130.475,81.975 v3(130.5,82) ; v1@134.433,86.5 137.758,86.5 138.954,85.304 138.954,83.115 137.253,81.414 136.979,81.414 J2.B6
  L4 (GND) w0.3: v3@130.5,82.5 130.5,83.469 132.153,85.122 133.345,86.314 133.814,86.314 v1(134,86.5)
GND: C1.2 C2.2 C3.2 C4.2 C5.2 C6.2 C7.1 C8.2 C9.2 C10.2 C11.1 C12.1 C13.1 C14.1 C17.2 C18.2 C19.2 D1.A D2.2 D3.A D4.A D5.A D6.A J1.4 J2.A1B12 J2.B1A12 MK1.4 MK1.5 MK1.6 MK1.9 MK2.5 MK2.6 MK2.9 R1.1 R10.1 R11.1 R12.1 R15.1 U1.10 U1.19 U1.26 U1.49 U1.74 U1.99 U2.1 X1.2 X1.4 | length 261.6
  L1 (Signal) w0.2: U1.74 111,83 111,82.996 111.868,82.996 111.972,83.1 C3.2
  L1 (Signal) w0.3: X1.4@86.5,77 86.6,77 87.596,76.004 88.096,76.004 89.05,75.05 X1.2 89.55,74.65 90.25,74.65 C18.2 91.71,73.9 92.31,74.5 v1(92.5,74.5) 92.5,74.238 92.89,73.848 92.89,73.51 C17.2 94.1,74.5 U1.19 ; X1.4 86.95,76.95 87.4,77.4 C9.2 ; 87.596,77.635 88.351,78.39 88.49,78.39 C10.2 ; MK1.6 88.22,61.77 88.193,61.797 88.247,61.797 88.989,62.539 88.989,63.461 88.22,64.23 MK1.4 ; MK1.9 93.17,61.67 v1(94,62.5) 96.02,62.5 97,61.52 ; v1(91.5,79) 92.275,79.775 92.275,80.875 ; C7.1@91.5,81.25 92.65,81.25 ; C19.2 93.4,69.9 ; v1@93.5,65.5 93.5,65.677 94.577,66.754 95.423,66.754 95.704,66.473 95.704,66.346 96,66.05 R12.1 96,67.3 93.4,69.9 ; U1.10 93.7,79 93.41,79.29 93.11,79.29 C6.2 C1.2 92.65,81.25 ; 96,67.4 C5.2 ; v1@96,72.5 96,71.429 94.471,69.9 93.4,69.9 ; U1.26 96.5,68.1 C5.2 ; 96.659,62.449 96.659,62.331 97.22,61.77 MK2.6 ; 97,67 96.71,67.29 96.71,67.89 C5.2 ; U1.99 97,85.788 97.154,85.942 97.154,86.463 97.264,86.573 97.264,87 97.264,87.427 95.691,89 93.5,89 90,85.5 90,81.051 90.176,80.875 92.275,80.875 ; C2.2 98,87 98.552,87.552 98.552,87.773 99.104,88.325 99.325,88.325 R1.1 100.5,89.5 v1(102.5,89.5) ; v1(99.5,59) 100.37,59.87 MK2.9 ; v1(103,67.5) 105.22,67.5 105.681,67.039 107.639,67.039 C4.2 108,68.6 U1.49 ; v1@109,83 U1.74 ; D1.A 109,92.45 109.5,91.95 v1@109.5,91.5 ; v1(109.5,91) 110.35,91.85 110.35,92.35 D3.A ; v1@114.5,67 114.611,66.889 120.058,66.889 120.855,67.686 120.855,67.904 121.652,68.701 122.375,68.701 123.281,67.795 U2.1 ; v1(116,90.5) 116,90.762 115.5,91.262 D6.A D4.A 117.5,93.58 J1.4 116.08,96.824 116.256,97 119.5,97 119.925,96.575 119.925,93.125 120.5,92.55 D5.A ; C12.1 C11.1 124,71.021 123.143,70.164 C13.1 123.518,69.625 123.518,68.633 124.29,67.861 U2.1 ; v1@133.5,81.5 133.5,81 ; R11.1 134.029,79 133.49,79.539 133.03,79.539 ; R10.1 134.95,82 134.654,81.704 134.527,81.704 134.246,81.423 134.246,81.246 134,81 133.5,81 ; v1(135,85) 136.04,83.96 136.775,83.96 J2.B1A12 ; J2.A1B12 136.65,77.41 135.74,76.5 133.531,76.5 131.961,78.07 131.961,78.93 132.57,79.539 133.03,79.539 ; 92.275,80.875 92.65,81.25 ; U2.1 125.38,67.795 125.657,67.518 126.625,67.518 C14.1 128.396,67.143 128.7,67.447 129.447,67.447 R15.1 129.5,73.06 127.696,74.864 127.696,80.473 128.073,80.85 128.55,80.85 D2.2 133.5,81 ; 133.03,79.539 133.5,80.009 133.5,81
  L4 (GND) w0.2: v1@97.758,66.492 98.266,67 99.399,67 100,67.601 100,69.057 100.117,69.174 102.209,69.174 102.948,68.435 102.948,67.552 v1(103,67.5)
  L4 (GND) w0.3: v1@91.5,78.5 92.039,77.961 92.539,77.961 92.539,74.539 v1(92.5,74.5) 92.686,74.686 93.421,74.686 93.735,75 96.324,75 96.5,74.824 v1(96.5,72.5) ; v1(93,65.5) 93,63.247 93.747,62.5 v1(94,62.5) 97.915,58.585 98.223,58.585 98.452,58.814 99.314,58.814 v1(99.5,59) ; v1(97.495,66.492) v1@97.758,66.492 ; 102.047,69.012 102.209,69.174 106.574,73.539 113.43,73.539 114.5,72.469 v1(114.5,67.5) ; v1(102.5,89.5) 104,91 v1(109.5,91) ; v1(108.5,83) 101.5,83 101,83.5 101,87 102.461,88.461 106.961,88.461 v1(109.5,91) ; v1@115.5,90.5 115,91 v1(109.5,91) ; v1(133.5,82) 133.5,83.5 134,84 134.5,84.5
I2S2_CK: MK1.1 MK2.1 U1.52 | length 42.5
  L1 (Signal) w0.3: v1(90.14,63) 91.37,64.23 MK1.1 ; MK2.1 100.37,64.23 100.42,64.18 100.52,64.18 101.2,63.5 v1@102.5,63.5 ; U1.52 112.238,72 112.738,72.5 v1(113,72.5)
  L4 (GND) w0.2: v1(90.14,63) 90.14,59.36 91.5,58 99.899,58 103,61.101 v1(103,63.5)
  L4 (GND) w0.3: v1(103,63.5) 104.128,64.628 107.097,64.628 113,70.531 v1@113,72
I2S2_SDI: MK1.2 MK2.2 R12.2 U1.17 | length 28.6
  L1 (Signal) w0.3: MK1.2 90.32,64.43 91,65.11 v3@91,65.5 ; U1.17 95.823,75.5 95.877,75.446 97.554,75.446 v1(99,74) ; R12.2 95,65.176 95.176,65 96.819,65 96.853,65.034 98.716,65.034 99.32,64.43 MK2.2
  L4 (GND) w0.3: v3(91,66) 90.784,66 90.323,66.461 90.07,66.461 89.461,67.07 89.461,68.961 91,70.5 97.824,70.5 98,70.676 98,73.5 v1@98.5,74
I2S2_WS: MK1.3 MK2.3 U1.51 | length 29.1
  L1 (Signal) w0.3: MK2.3 98.32,64.28 98.32,63.58 98.972,62.928 100.967,62.928 101.434,62.461 110.961,62.461 v1(112.5,64) ; v1(107.5,72.5) 108.446,71.554 109.549,71.554 109.603,71.5 U1.51 ; v1@110.5,69.5 v1(112.5,67.5)
  L4 (GND) w0.3: v1@107.5,72 108,71.5 v1(110,69.5) ; v1(112.5,64) v1(112.5,67.5)
LED_PWR_K: D7.K R15.2 | length 1.5
  L1 (Signal) w0.3: D7.K R15.2
MCU_BOOT0: R1.2 U1.94 | length 2.2
  L1 (Signal) w0.3: U1.94 R1.2
MCU_NRST: R2.2 R9.1 U1.14 | length 36
  L1 (Signal) w0.3: R2.2 93.175,76.175 93.396,76.175 93.729,76.508 93.729,76.824 93.905,77 U1.14 94.804,77.054 95.069,77.054 95.461,77.446 95.461,77.07 96.531,76 v1@98,76 ; v1(120.5,85.5) R9.1
  L4 (GND) w0.3: v1(98.5,76) 103.5,76 113,85.5 v1@120,85.5
MCU_OSC_IN: C9.1 U1.12 X1.1 | length 24.1
  L1 (Signal) w0.2: v1(85.5,80) 86.49,79.01 C9.1@86.49,78.61 ; U1.12@95.125,78.054 v1@97,79.929
  L1 (Signal) w0.3: v1(85.5,80) 85.446,79.946 85.446,76.054 86.4,75.1 X1.1@86.5,75.1 ; C9.1@86.49,78.61 C9.1 ; U1.12 94.804,78.054 U1.12@95.125,78.054 ; v1@97,79.929 v1(97,80)
  L4 (GND) w0.2: 85,80.419 85,81.383 85.117,81.5 88,81.5 89,80.5 96.238,80.5 v1@96.738,80
  L4 (GND) w0.3: v1@96.738,80 v1(97,80)
MCU_OSC_OUT: R3.1 U1.13 | length 14
  L1 (Signal) w0.3: v1(86.989,80.5) 87.989,79.5 R3.1 ; U1.13 v1@96,77.5
  L4 (GND) w0.2: 88.625,80 94,80 v1(96.5,77.5)
  L4 (GND) w0.3: v1(86.989,80.5) 88.125,80.5 88.625,80
MCU_SWCLK: R6.1 U1.76 | length 8.1
  L1 (Signal) w0.3: v1@106.686,86.814 v1(106.5,87) 108,87 108.5,86.5 U1.76 ; v1@110,88.5 110,88.95 110.5,89.45 R6.1
  L4 (GND) w0.3: 107,87.5 107.5,88 v1(110,88)
MCU_SWDIO: R7.1 U1.72 | length 14.6
  L1 (Signal) w0.3: R7.1 107.5,88.5 109.126,86.874 109.126,84.554 108.817,84.246 107.176,84.246 107,84.07 107,81.176 107.176,81 108.5,81 109.5,82 U1.72
MCU_SWO: R8.1 U1.89 | length 17.9
  L1 (Signal) w0.3: U1.89 102,86.824 102.176,87 v1(103.5,87) ; v1@115.5,88 116.05,88 117.5,89.45 R8.1
  L4 (GND) w0.3: 104,86.5 104.539,85.961 109.43,85.961 111.469,88 v1(115,88)
MCU_VCAP: C8.1 U1.48 U1.73 | length 27.4
  L1 (Signal) w0.2: U1.73 111.336,82.5 111.336,82.222 111.5,82.058 114.558,82.058 v1@115,82.5
  L1 (Signal) w0.3: C8.1 106.775,68 107.446,68.671 107.446,69.75 U1.48 107.5,70.824 107.676,71 109.32,71 109.374,70.946 114.685,70.946 114.915,71.176 114.915,73.915 v1(115,74)
  L4 (GND) w0.3: v1@115,74.5 v1(115,83)
NetC15_1: C15.1 MK1.7 | length 9.4
  L1 (Signal) w0.3: MK1.7 89.27,61.57 88.666,60.966 87.853,60.966 87.026,61.793 87.026,65.026 87.5,65.5 87.823,65.5 88.077,65.246 88.923,65.246 89.204,65.527 89.204,65.654 89.5,65.95 C15.1
NetC16_1: C16.1 MK2.7 | length 11.1
  L1 (Signal) w0.3: MK2.7 98.27,61.77 98.874,62.374 100.737,62.374 101.314,61.797 101.314,61.186 v1(101.5,61) ; C16.1 100.824,66 101.824,65 v1(102,65)
  L4 (GND) w0.3: v1(101.5,61) 101.5,63.369 102,63.869 v1(102,65)
NetD4_K: D4.K J1.5 R8.2 | length 5.5
  L1 (Signal) w0.3: R8.2 D4.K 118.56,92.56 118.56,94.94 J1.5
NRST: D5.K J1.6 R9.2 | length 5.6
  L1 (Signal) w0.3: J1.6 121.35,94.81 121.35,92.65 D5.K R9.2
SWCLK: D3.K J1.2 R6.2 | length 5.7
  L1 (Signal) w0.3: J1.2 111,94.656 111.5,94.156 D3.K R6.2
SWDIO: D1.K J1.1 R7.2 | length 5.9
  L1 (Signal) w0.3: J1.1 108.46,93.688 108.072,93.3 108.072,92.572 D1.K 108,91.175 108.5,90.675 R7.2
USB_CC1: J2.A5 R11.2 | length 2.2
  L1 (Signal) w0.3: R11.2 135.15,79.85 135.41,79.85 135.9,79.36 J2.A5
USB_CC2: J2.B5 R10.2 | length 2.8
  L1 (Signal) w0.3: R10.2 135.77,81 135.946,81.176 135.946,81.655 136.597,82.306 136.806,82.306 136.86,82.36 J2.B5
USB_D_N: D2.6 U1.70 | length 16.9
  L1 (Signal) w0.3: U1.70 112.324,81 112.5,80.824 112.5,80.176 112.676,80 126.25,80 D2.6
USB_D_P: D2.4 U1.71 | length 16.3
  L1 (Signal) w0.3: U1.71 110.25,81.554 113.446,81.554 113.5,81.5 125.373,81.5 125.577,81.704 125.754,81.704 126,81.95 D2.4
VBUS: C11.2 D2.5 FB1.1 J2.A4B9 J2.B4A9 | length 34.5
  L1 (Signal) w0.3: C11.2 123.75,74.5 FB1.1 123.875,76.125 123.875,78.375 v1(124,78.5) ; D2.5 126.45,81.15 127.15,81.15 127.5,81.5 v1@127.5,83.5 ; v1(127.5,84) 127.762,84 128.262,83.5 v1(132,83.5) 135.66,83.5 136.054,83.106 136.829,83.106 J2.B4A9 ; v1@133.29,78.21 J2.A4B9
  L4 (GND) w0.3: v1@124,79 124,83.5 124.5,84 v1(127.5,84) ; v1@132,83 132,79.5 v1(133,78.5)
VDD: MK1.8 MK2.4 MK2.8 | length 34.7
  L1 (Signal) w0.3: MK1.8 90.32,61.57 90.924,60.966 97.765,60.966 98.045,60.686 98.814,60.686 v1(99,60.5) ; v1@94.093,59.5 97.839,59.5 98.839,60.5 v1(99,60.5) ; v1(94.5,64) 94.762,64 95.092,64.33 MK2.4 ; MK2.8 99.32,60.82 v1(99,60.5)
  L4 (GND) w0.3: v1(93.5,59.5) 93.5,61.531 91.961,63.07 91.961,67.43 93.07,68.539 93.93,68.539 94.539,67.93 94.539,64.539 v1@94,64
VDDA: C17.1 C18.1 FB2.2 U1.20 U1.21 | length 6.3
  L1 (Signal) w0.3: FB2.2 91.11,71.64 91.11,72.99 C18.1 91.805,73.1 92.29,72.615 C17.1@92.985,72.615 ; C17.1 93.076,72.676 93.746,72.676 93.746,73.246 94,73.5 U1.21
XTAL_IN: C10.1 R3.2 X1.3 | length 2.7
  L1 (Signal) w0.3: X1.3@88.95,77.15 89.4,77.6 C10.1 89.425,78.525 89.425,79.475 R3.2 ; X1.3 X1.3@89.25,76.95
pads on no net: J2.A8 J2.B8 J2.MH J2.SH MK1. MK2. U1.1 U1.2 U1.3 U1.4 U1.5 U1.7 U1.8 U1.9 U1.15 U1.16 U1.18 U1.22 U1.23 U1.24 U1.25 U1.28 U1.29 U1.30 U1.31 U1.32 U1.33 U1.34 U1.35 U1.36 U1.37 U1.38 U1.39 U1.40 U1.41 U1.42 U1.43 U1.44 U1.45 U1.46 U1.47 U1.53 U1.54 U1.55 U1.56 U1.57 U1.58 U1.59 U1.60 U1.61 U1.62 U1.63 U1.64 U1.65 U1.66 U1.67 U1.68 U1.69 U1.77 U1.78 U1.79 U1.80 U1.81 U1.82 U1.83 U1.84 U1.85 U1.86 U1.87 U1.88 U1.90 U1.91 U1.92 U1.93 U1.95 U1.96 U1.97 U1.98

## Polygon pours and split planes (outlines as drawn)
GND on L2 (GND) "GND_L02_P000" (solid, pour order 0): 143,99 143,57.5 82,57.5 82,99 89,99 82,99 89,99
GND on L3 (GND) "GND_L03_P001" (solid, pour order 1): 143,99 143,57.5 82,57.5 82,99 89,99 82,99 89,99

## Silkscreen, mask and mechanical layers (free items; w line width, h text height)
Top Overlay:
  text "DIO" at 107.746,96.754 h1 r90
  text "CLK" at 112.246,96.754 h1 r90
  text "3V3" at 115.246,96.754 h1 r90
  text "GND" at 117.746,96.754 h1 r90
  text "D4" at 120.246,96.754 h1 r90
  text "NRST" at 123.746,94.754 h1 r90
  text "USB" at 138.254,72.754 h1.52
  text "INMP441" at 85.746,59.254 h1.52 r90
  text "Aiman Ishmam" at 107.254,57.254 h1.52
Mechanical 1:
  lines w0.15: 81.5,59.207 ccw(c83.207,59.207) 83.207,57.5 142.23,57.5 ccw(c142.23,58.77) 143.5,58.77 143.5,98.23 ccw(c142.23,98.23) 142.23,99.5 82.77,99.5 ccw(c82.77,98.23) 81.5,98.23 81.5,59.207

## Text inside footprints (layer, text, board x,y; h text height)
D7: Top 3D Body "+" at 128.992,62.617 h0.5 r90